# EAGLE board deployment (EAGLE 9.5.1)
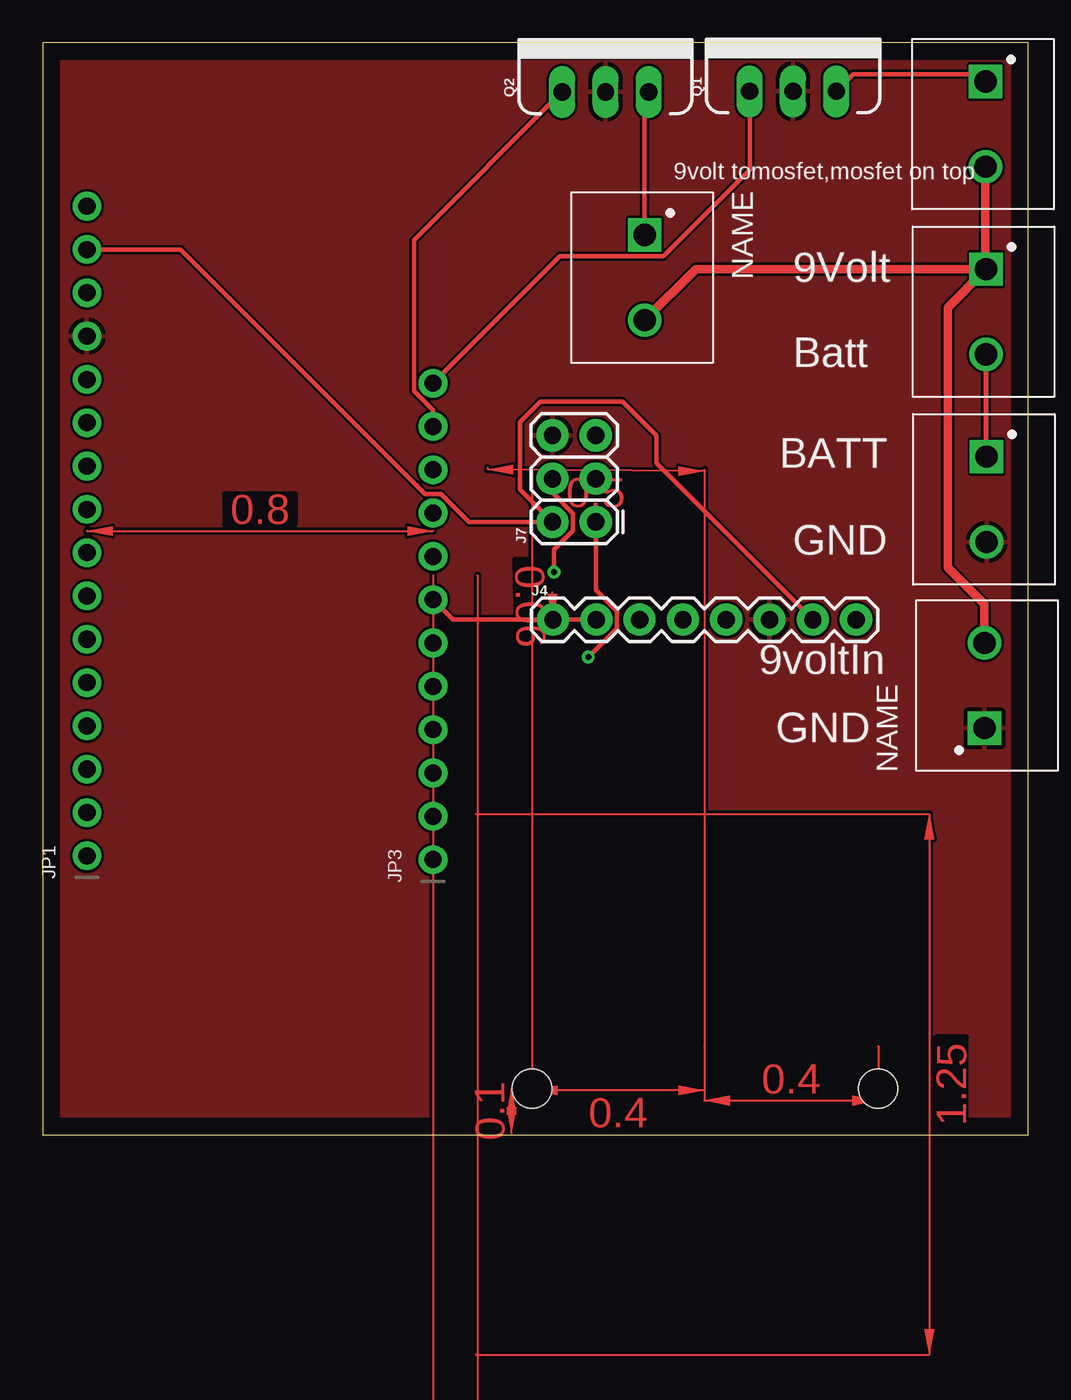
[diagram p0: board, top side]
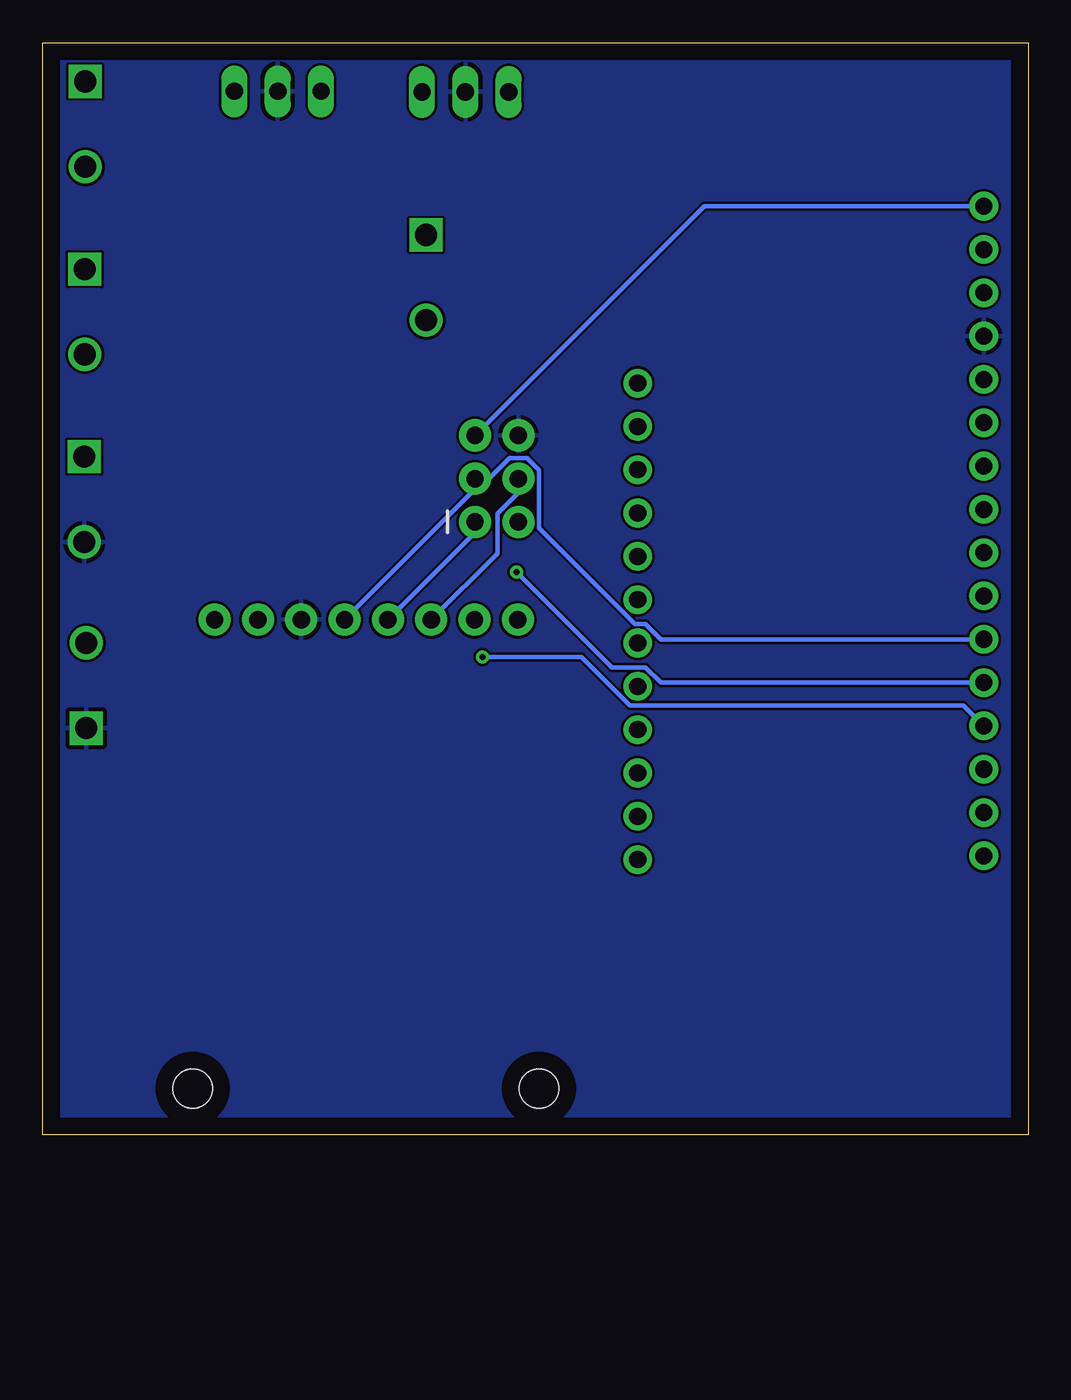
[diagram p1: board, bottom side, seen from below]

Size 57.8 x 64.04 mm. Coordinates in mm from the lower left corner, seen from the top.
Outline: 0,0 57.8,0 57.8,64.04 0,64.04 0,0
Copper layers (1*16): Top 0.035mm / dielectric 1.5mm / Bottom 0.035mm
Design rules "default": minimum track width 6mil, minimum drill 0.35mm, track to track 6mil, track to pad 6mil, pad to pad 6mil, via to via 6mil, smd to smd 6mil, copper to edge 40mil, drill to drill 6mil, minimum pad ring 10mil, minimum via ring 8mil, stop-mask expansion 4mil, vias tented up to drill 0mil, thermal gap 10mil
Holes 2.3 mm at 28.7,2.7 49,2.7

## Footprints (pad centres in the part's own frame; a part is rotated, then mirrored left to right if it is on the bottom)
PHOENIX_1935161 = drill 1.3 square: 1 -2.5,0 | drill 1.3: 2 2.5,0
1X08 = drill 1.016 pad 1.88: 1 0,0; 2 2.54,0; 3 5.08,0; 4 7.62,0; 5 10.16,0; 6 12.7,0; 7 15.24,0; 8 17.78,0
2X3 = drill 1.016 pad 1.88: 1 0,0; 2 0,2.54; 3 2.54,0; 4 2.54,2.54; 5 5.08,0; 6 5.08,2.54
1X16_ROUND = drill 1 pad 1.676: 1 -19.05,0; 2 -16.51,0; 3 -13.97,0; 4 -11.43,0; 5 -8.89,0; 6 -6.35,0; 7 -3.81,0; 8 -1.27,0; 9 1.27,0; 10 3.81,0; 11 6.35,0; 12 8.89,0; 13 11.43,0; 14 13.97,0; 15 16.51,0; 16 19.05,0
1X12_ROUND = drill 1 pad 1.676: 1 -13.97,0; 2 -11.43,0; 3 -8.89,0; 4 -6.35,0; 5 -3.81,0; 6 -1.27,0; 7 1.27,0; 8 3.81,0; 9 6.35,0; 10 8.89,0; 11 11.43,0; 12 13.97,0
TO220V = drill 1.016 long: 1 -2.54,0; 2 0,0; 3 2.54,0

## Placement (x,y rotation side)
J1  [PHOENIX_1935161]  55.3,59.26 270 top
J2  [PHOENIX_1935161]  55.33,48.26 270 top
J3  [PHOENIX_1935161]  55.36,37.26 270 top
J4  [1X08]  29.93,30.2 0 top
J5  [PHOENIX_1935161]  35.31,50.26 270 top
J6  [PHOENIX_1935161]  55.24,26.34 90 top
J7  AVR_SPI_PROG_3X2PTH  [2X3]  32.44,35.93 90 top
JP1  [1X16_ROUND]  2.6,35.4 90 top
JP3  [1X12_ROUND]  22.9,30.1 90 top
Q1  100V 14A  [TO220V]  44.01,61.19 0 top
Q2  100V 14A  [TO220V]  33.01,61.15 0 top

## Library data of the parts
J1-J3 J5 J6 = 1935161; DESCRIPTION: Conn Terminal Blocks 2 POS 5mm Solder ST Thru-Hole 16A; DIGI-KEY_PART_NUMBER: 277-1667-ND; DIGI-KEY_PURCHASE_URL: https://www.digikey.com/product-detail/en/phoenix-contact/1935161/277-1667-ND/568614?utm_source=snapeda&utm_medium=aggregator&utm_campaign=symbol; MF: Phoenix Contact; MP: 1935161; PACKAGE: None
J4 = SparkFun-Connectors; PROD_ID: CONN-08438
J7 = SparkFun-Connectors
JP1 JP3 = microbuilder
Q1 Q2 = SparkFun-DiscreteSemi; PROD_ID: TRANS-10060

## Nets
0: JP1.3
1: JP1.2
2: JP3.12 Q1.1
3: JP3.11 Q2.1
5: JP3.10
6: JP3.9
9: JP3.8
9V: J1.2 J2.1 J5.2 J6.2
10: J4.1 J4.2 JP3.7
11: JP3.6
12: JP3.5
13: JP3.4
+3V3: J4.7 J7.2 JP1.15
A0: JP1.12
A1: JP1.11
A2: JP1.10
A3: JP1.9
A4: JP1.8
A5: JP1.7
AREF: JP1.14
BATT+: J2.2 J3.1
DIO1: JP1.1
EN: JP3.2
GND: J3.2 J4.6 J6.1 J7.6 JP1.13 Q1.2 Q2.2
MISO: J4.4 J7.1 JP1.4
MOSI: J4.3 J7.4 JP1.5
N$1: J1.1 Q1.3
N$2: J5.1 Q2.3
N$9: J4.8
RST: J7.5 JP1.16
SCK: J4.5 J7.3 JP1.6
VBAT: JP3.1
VBUS: JP3.3

## Tracks (layer width: path | path; a pad name or v marks a point on that pad's centre or on a via)
2
  Top 0.25: JP3.12 30.34,51.51 36.4,51.51 41.39,56.5 41.4,56.5 41.47,56.57 Q1.1
3
  Top 0.25: JP3.11 22.9,42.49 21.78,43.61 21.78,52.46 Q2.1
9V
  Top 0.25: J2.1 55.3,50.79
  Top 0.5: J6.2 55.24,31.11 53.08,33.27 53.08,48.51 J2.1 38.31,50.76 J5.2 | 55.3,50.79 J1.2
10
  Top 0.25: J4.2 J4.1 24.07,30.2 JP3.7
+3V3
  Top 0.25: JP1.15 8.09,51.91 22.43,37.57 23.36,37.57 25,35.93 J7.2 28,37.83 28,41.8 29.2,43 34,43 36,41 36,39.37 J4.7
BATT+
  Top 0.152: 55.33,39.79 J3.1
  Top 0.3: J2.2 55.33,39.79
GND
  pour Bottom: 0,66 63,66 63,-50 0,-50
  pour Top: 0,66 63,66 63,-49 0,-20
MISO  (via drill 0.35)
  Top 0.25: J7.1 32.44,31.95 33.69,30.7 33.69,29.69 v32,28
  Bottom 0.25: J4.4 32.44,35.31 J7.1 | JP1.4 3.8,25.17 23.36,25.17 26.19,28 v32,28
MOSI  (via drill 0.35)
  Top 0.25: J7.4 29.9,37.65 31.12,36.43 31.12,35.43 30,34.31 v30,33
  Bottom 0.25: J4.3 31.12,34.09 31.12,36.43 29.9,37.65 J7.4 | JP1.5 21.54,26.51 22.44,27.41 24.41,27.41 v30,33
N$1
  Top 0.152: 54.87,62.19 J1.1
  Top 0.25: 54.87,62.19 47.55,62.19 Q1.3
N$2
  Top 0.152: 35.31,60.91 Q2.3
  Top 0.25: J5.1 35.31,60.91
RST
  Bottom 0.25: J7.5 19,54.45 JP1.16
SCK
  Bottom 0.25: J4.5 32.44,37.85 J7.3 31.62,38.47 30.4,39.69 29.4,39.69 28.68,38.97 28.68,35.58 23.05,29.95 22.44,29.95 21.54,29.05 JP1.6
(copper drawn outside any net)
  shapes: Top area x8

## Text on the board
tNames: 9volt tomosfet,mosfet on top | 9Volt | Batt | BATT | GND | 9voltIn | GND